# EAGLE board nand_synth (EAGLE 5.07)
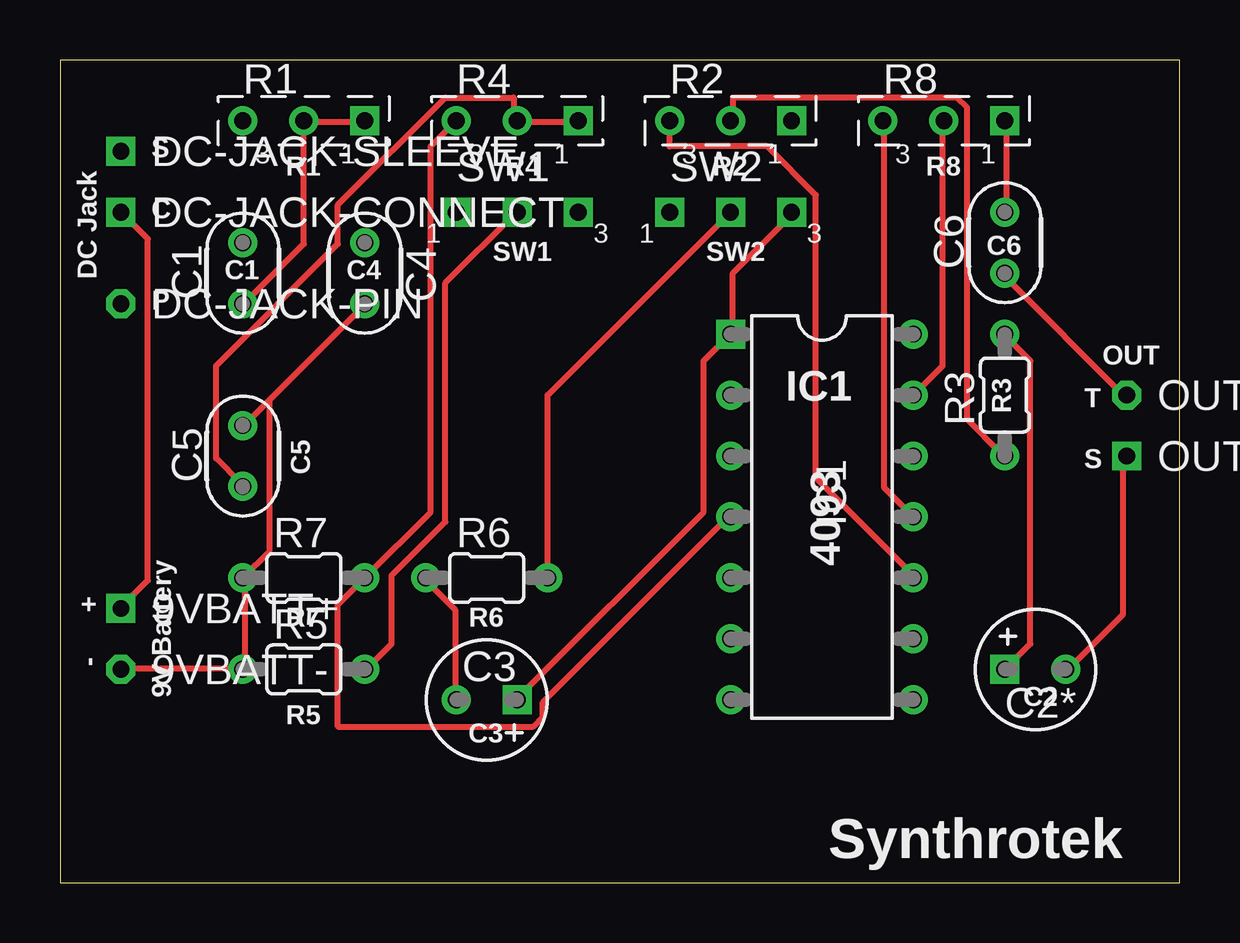
[diagram p0: board, top side]
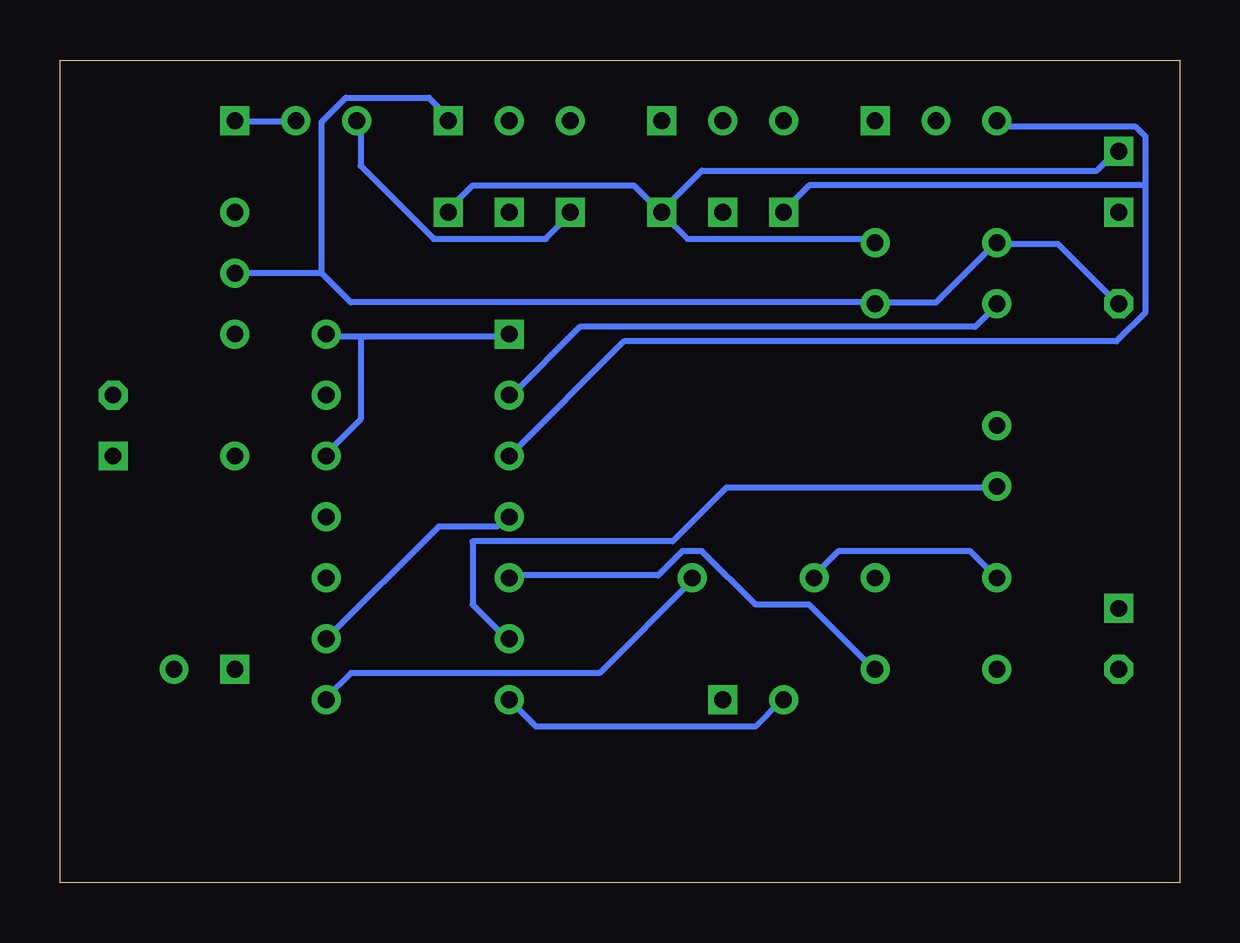
[diagram p1: board, bottom side, seen from below]

Size 46.66 x 34.28 mm. Coordinates in mm from the lower left corner, seen from the top.
Outline: 0,0 46.66,0 46.66,34.28 0,34.28 0,0
Copper layers (1*16): Top 0.035mm / dielectric 1.5mm / Bottom 0.035mm
Design rules "default": minimum track width 10mil, minimum drill 24mil, track to track 8mil, track to pad 8mil, pad to pad 8mil, via to via 8mil, smd to smd 8mil, copper to edge 40mil, drill to drill 8mil, minimum pad ring 10mil, minimum via ring 8mil, stop-mask expansion 4mil, vias tented up to drill 0mil, thermal gap 10mil

## Footprints (pad centres in the part's own frame; a part is rotated, then mirrored left to right if it is on the bottom)
SQUARE = drill 0.7 square: 1 0,0
OCTOGON = drill 0.7 octagon: 1 0,0
050X030_025 = drill 0.7 round: 1 -1.27,0; 2 1.27,0
050_020_1 = drill 0.7 square: + -1.27,0 | drill 0.7 round: - 1.27,0
DIL14 = drill 0.7 square: 1 -7.62,-3.81 | drill 0.7 round: 2 -5.08,-3.81; 3 -2.54,-3.81; 4 0,-3.81; 5 2.54,-3.81; 6 5.08,-3.81; 7 7.62,-3.81; 8 7.62,3.81; 9 5.08,3.81; 10 2.54,3.81; 11 0,3.81; 12 -2.54,3.81; 13 -5.08,3.81; 14 -7.62,3.81
POT = drill 0.7 square: 1 2.54,0 | drill 0.7 round: 2 0,0; 3 -2.54,0
R0204/2 = drill 0.7 round: 1 -2.54,0; 2 2.54,0
SPDT = drill 0.7 square: 1 -2.54,0; 2 0,0; 3 2.54,0

## Placement (x,y rotation side)
9VBATT+  [SQUARE]  2.54,11.43 0 top
9VBATT-  [OCTOGON]  2.54,8.89 0 top
C1  0.1uF  [050X030_025]  7.62,25.4 90 top
C2*  2.2uF  [050_020_1]  40.64,8.89 0 top
C3  100uF  [050_020_1]  17.78,7.62 180 top
C4  0.1uF  [050X030_025]  12.7,25.4 270 top
C5  0.1uF  [050X030_025]  7.62,17.78 90 top
C6  0.1uF  [050X030_025]  39.37,26.67 90 top
DC-JACK-CONNECT  [SQUARE]  2.54,27.94 0 top
DC-JACK-PIN  [OCTOGON]  2.54,24.13 0 top
DC-JACK-SLEEVE  [SQUARE]  2.54,30.48 0 top
IC1  4093  [DIL14]  31.75,15.24 270 top
OUT-SLEEVE  [OCTOGON]  44.45,20.32 0 top
OUT-TIP  [SQUARE]  44.45,17.78 0 top
R1  1M  [POT]  10.16,31.75 0 top
R2  100k  [POT]  27.94,31.75 0 top
R3  100k  [R0204/2]  39.37,20.32 90 top
R4  100k  [POT]  19.05,31.75 0 top
R5  100k  [R0204/2]  10.16,8.89 0 top
R6  100k  [R0204/2]  17.78,12.7 0 top
R7  100k  [R0204/2]  10.16,12.7 0 top
R8  1M  [POT]  36.83,31.75 0 top
SW1  [SPDT]  19.05,27.94 0 top
SW2  [SPDT]  27.94,27.94 0 top

## Library data of the parts
9VBATT+ 9VBATT- DC-JACK-CONNECT DC-JACK-PIN DC-JACK-SLEEVE OUT-SLEEVE OUT-TIP = gm-supply
C1 C4-C6 = gm-caps-ceramic
C2* C3 = gm-caps-electro-pol
IC1 = gm-ics
R1 R2 R4 R8 = gm-pots
R3 R5-R7 = gm-resistors
SW1 SW2 = gm-switches

## Nets
+9V: C3.+ C4.1 DC-JACK-SLEEVE.1 IC1.1 IC1.12 IC1.14 SW1.3 SW2.3
GND: 9VBATT-.1 C1.2 C3.- C4.2 C5.2 C6.1 DC-JACK-PIN.1 IC1.7 OUT-SLEEVE.1 R2.1 R5.1 R6.1 R7.1
N$1: C1.1 IC1.2 R1.1 R1.2
N$2: C5.1 IC1.6 R4.1 R4.2
N$3: IC1.3 R1.3 SW1.1
N$4: IC1.8 R6.2 SW2.2
N$5: IC1.5 R5.2 SW1.2
N$6: IC1.4 IC1.9 R4.3 R7.2
N$7: IC1.10 R2.3
N$8: 9VBATT+.1 DC-JACK-CONNECT.1
N$9: R2.2 R3.1
N$10: C2*.+ R3.2
N$11: IC1.11 R8.3 SW2.1
N$12: C2*.- OUT-TIP.1
N$14: C6.2 IC1.13 R8.1 R8.2

## Tracks (layer width: path | path; a pad name or v marks a point on that pad's centre or on a via)
+9V
  Top 0.254: C3.+ 19.1,7.72 26.82,15.44 26.82,21.74 IC1.1 28.04,22.96 28.04,25.4 30.48,27.84 SW2.3
  Bottom 0.254: C4.1 12.8,26.82 20.52,26.82 21.54,27.84 SW1.3 | DC-JACK-SLEEVE.1 2.64,30.48 3.45,29.67 19.91,29.67 21.54,28.04 SW1.3 | 34.14,22.76 34.14,19.3 35.56,17.88 IC1.12 | 34.14,22.76 35.56,22.76 IC1.14 | 34.14,22.76 28.04,22.76 IC1.1 | SW1.3 21.74,28.04 22.76,29.06 29.46,29.06 30.48,28.04 SW2.3
GND
  Top 0.254: OUT-SLEEVE.1 44.3,20.32 39.42,25.2 39.42,25.4 C6.1 | R6.1 15.24,12.6 16.46,11.38 16.46,7.72 C3.- | 9VBATT-.1 2.64,8.94 7.52,8.94 R5.1 7.72,8.94 7.72,12.6 R7.1 8.74,13.82 8.74,20.12 | 8.74,20.12 12.6,23.98 C4.2 | 8.74,20.12 7.72,19.1 C5.2
  Bottom 0.254: 35.76,25.4 35.76,31.7 34.75,32.72 31.29,32.72 30.48,31.9 R2.1 | 35.76,25.4 C6.1 | IC1.7 26.82,6.5 17.68,6.5 16.66,7.52 C3.- | DC-JACK-PIN.1 2.64,24.18 5.08,26.62 7.52,26.62 C1.2 7.72,26.62 10.16,24.18 12.6,24.18 C4.2 12.8,24.18 34.54,24.18 35.76,25.4 | R6.1 15.24,12.8 14.22,13.82 8.74,13.82 R7.1
N$1
  Top 0.254: 10.16,31.7 10.16,26.62 7.72,24.18 C1.1 | 10.16,31.7 12.6,31.7 R1.1 | 10.16,31.7 R1.2
  Bottom 0.254: IC1.2 27.84,20.32 24.99,23.16 8.53,23.16 7.72,23.98 C1.1
N$2
  Top 0.254: C5.1 7.52,16.66 6.5,17.68 6.5,21.54 11.58,26.62 11.58,28.25 16.05,32.72 18.9,32.72 18.9,31.9 R4.2 19.1,31.7 21.54,31.7 R4.1
  Bottom 0.254: IC1.6 28.04,10.16 29.46,11.58 29.46,14.22 21.13,14.22 18.9,16.46 7.72,16.46 C5.1
N$3
  Bottom 0.254: 1.42,29.06 1.42,31.09 1.83,31.5 7.32,31.5 7.52,31.7 R1.3 | 1.42,29.06 15.44,29.06 16.46,28.04 SW1.1 | 1.42,29.06 1.42,23.77 2.64,22.55 23.16,22.55 IC1.3
N$4
  Top 0.254: SW2.2 20.32,20.32 R6.2
  Bottom 0.254: R6.2 20.32,12.6 24.18,8.74 34.54,8.74 35.56,7.72 IC1.8
N$5
  Top 0.254: SW1.2 18.9,27.84 16.05,24.99 16.05,15.04 13.82,12.8 13.82,9.96 12.8,8.94 R5.2
  Bottom 0.254: R5.2 12.8,8.94 15.44,11.58 17.68,11.58 19.91,13.82 20.73,13.82 21.74,12.8 27.84,12.8 IC1.5
N$6
  Top 0.254: R4.3 15.44,30.68 15.44,15.44 R7.2 11.58,11.58 11.58,6.5 19.71,6.5 20.12,6.91 20.12,7.52 27.84,15.24 IC1.4
  Bottom 0.254: IC1.9 30.89,14.83 28.45,14.83 28.04,15.24 IC1.4
N$7
  Top 0.254: IC1.10 35.56,12.8 31.5,16.87 31.5,28.65 29.46,30.68 25.4,30.68 R2.3
N$8
  Top 0.254: 9VBATT+.1 2.64,11.58 3.66,12.6 3.66,26.82 DC-JACK-CONNECT.1
N$9
  Top 0.254: R3.1 39.22,17.88 37.8,19.3 37.8,32.31 37.39,32.72 28.04,32.72 28.04,31.9 R2.2
N$10
  Top 0.254: C2*.+ 40.44,9.96 40.44,21.74 39.42,22.76 R3.2
N$11
  Top 0.254: IC1.11 34.34,16.46 34.34,31.7 R8.3
  Bottom 0.254: SW2.1 25.4,27.84 26.42,26.82 31.09,26.82 34.14,29.87 34.14,31.7 R8.3
N$12
  Top 0.254: C2*.- 42.06,8.94 44.3,11.18 44.3,17.68 OUT-TIP.1
N$14
  Top 0.254: C6.2 39.42,28.04 39.42,31.7 R8.1 | IC1.13 36.78,21.54 36.78,31.7 R8.2
  Bottom 0.254: R8.1 39.22,31.7 36.98,31.7 R8.2

## Text on the board
tPlace: S | R1 | R4 | R2 | R8 | C | SW1 | SW2 | C6 | DC Jack | C1 | C4 | P | OUT | IC1 | R3 | T | C5 | S | 9V Battery | 4093 | + | R7 | R6 | - | R5 | C2 | C3 | Synthrotek